# Altium PCB SolarArray1_referencelines.PcbDoc
Units mil, origin at the board's own origin, x right, y up, seen from the top; angles counter-clockwise.
Board outline 3228.35 x 12598.43 mil, 2 copper layers (Top Layer, Bottom Layer), stack 61.7 mil thick; 59 components, 33 nets, 165 pads, 0 vias.
Unrouted connection lines stored in the file: 80.
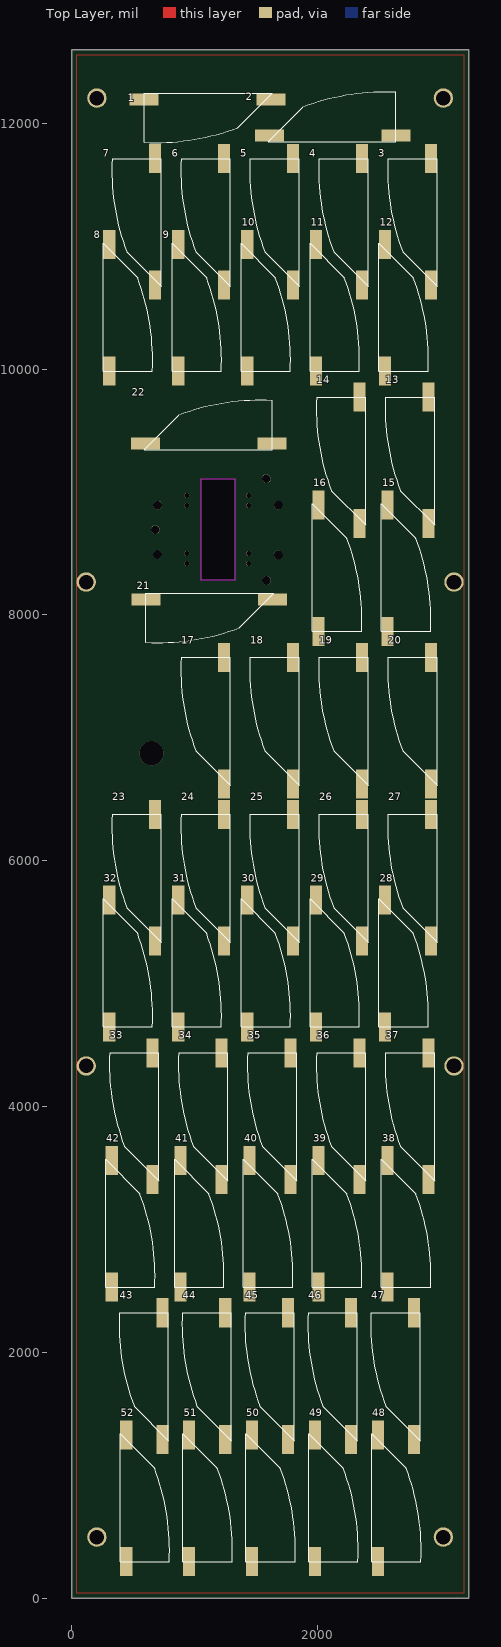
[diagram p0: Top Layer view]
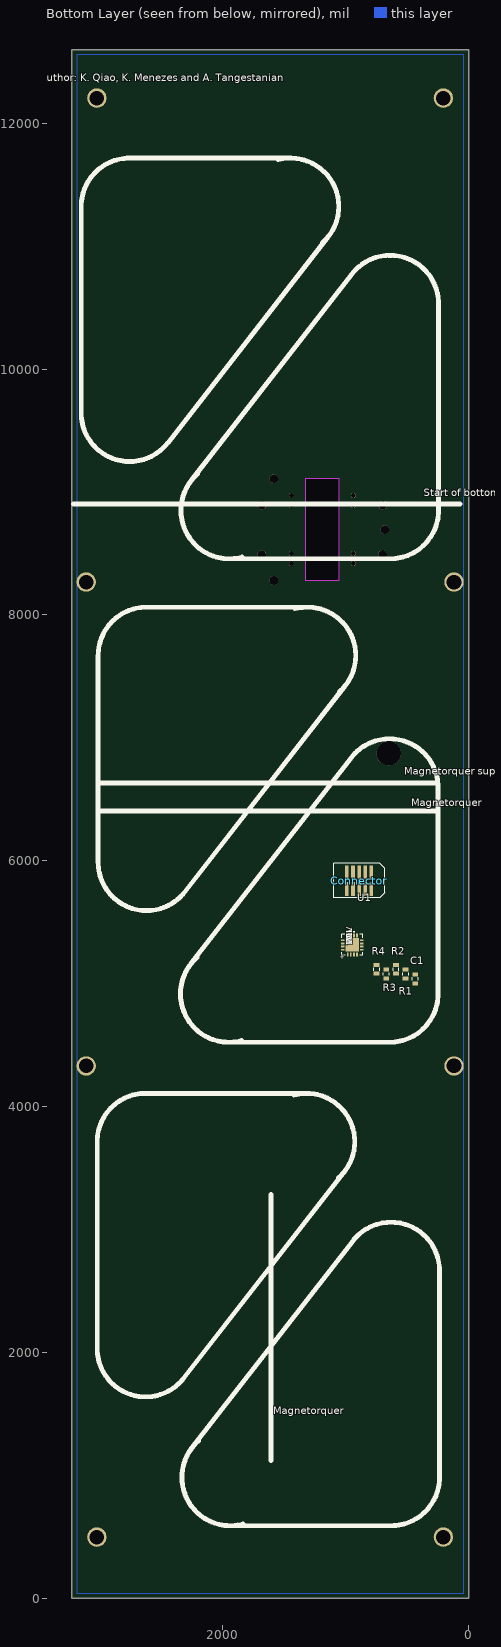
[diagram p1: Bottom Layer view, seen from below]

## Layer stack, top to bottom
Top Solder: solder mask 0.4, Solder Resist, Dk 3.5
Top Layer: signal copper 1.4
Dielectric 1: dielectric 58.9, FR-4, Dk 4.8
Bottom Layer: signal copper 1.4
Bottom Solder: solder mask 0.4, Solder Resist, Dk 3.5

## Board outline
3228.35,0 3228.35,12598.43 0,12598.43 0,0
cut-out: 1327.58,9109.5 1327.58,8282.73 1051.99,8282.73 1051.99,9109.5

## Design rules (kind name [scope] priority, off if disabled: settings)
Clearance Clearance(top_overlay) [OnLayer('Top Overlay') vs OnLayer('Top Overlay')] p1 off: gap=10
Clearance Clearance(bottom) [OnLayer('Bottom Layer') vs OnLayer('Bottom Layer')] p2 off: gap=10
Clearance Clearance(top) [OnLayer('Top Layer') vs OnLayer('Top Layer')] p3 off: gap=10
PolygonConnect [All] p1: connectstyle=Relief reliefconductorwidth=10 reliefentries=4 polygonreliefangle="90 Angle" airgapwidth=10
RoutingVias [All] p1: holewidth=28 width=50 viastyle="Through Hole" minholewidth=28 minwidth=50 maxholewidth=28 maxwidth=50
SolderMaskExpansion [All] p1: expansion=4
Width [All] p1: maxlimit=39.37 minlimit=10 preferedwidth=10 minimp=50.000000 maximp=50.000000 favimp=50.000000
30 further rules are at their usual default settings.

## Components (designator, comment, footprint, x,y, rotation, side; value= is the part's Value field where it differs from the comment)
1 "Trisol X Solar Wing" PCBComponent_1 1740.16,12244.09 r180 top
2 "Trisol X Solar Wing" PCBComponent_1 1488.19,11850.39 r0 top
3 "Trisol X Solar Wing" PCBComponent_1 2972.44,10562.99 r90 top
4 "Trisol X Solar Wing" PCBComponent_1 2411.42,10562.99 r90 top
5 "Trisol X Solar Wing" PCBComponent_1 1850.39,10562.99 r90 top
6 "Trisol X Solar Wing" PCBComponent_1 1289.37,10562.99 r90 top
7 "Trisol X Solar Wing" PCBComponent_1 728.35,10562.99 r90 top
8 "Trisol X Solar Wing" PCBComponent_1 255.91,11133.86 r270 top
9 "Trisol X Solar Wing" PCBComponent_1 816.93,11133.86 r270 top
10 "Trisol X Solar Wing" PCBComponent_1 1377.95,11133.86 r270 top
11 "Trisol X Solar Wing" PCBComponent_1 1938.98,11133.86 r270 top
12 "Trisol X Solar Wing" PCBComponent_1 2500,11133.86 r270 top
13 "Trisol X Solar Wing" PCBComponent_1 2952.76,8622.05 r90 top
14 "Trisol X Solar Wing" PCBComponent_1 2391.73,8622.05 r90 top
15 "Trisol X Solar Wing" PCBComponent_1 2519.68,9015.75 r270 top
16 "Trisol X Solar Wing" PCBComponent_1 1958.66,9015.75 r270 top
17 "Trisol X Solar Wing" PCBComponent_1 1289.37,6503.94 r90 top
18 "Trisol X Solar Wing" PCBComponent_1 1850.39,6503.94 r90 top
19 "Trisol X Solar Wing" PCBComponent_1 2411.42,6503.94 r90 top
20 "Trisol X Solar Wing" PCBComponent_1 2972.44,6503.94 r90 top
21 "Trisol X Solar Wing" PCBComponent_1 1753.86,8175.98 r180 top
22 "Trisol X Solar Wing" PCBComponent_1 479.92,9344.25 r0 top
23 "Trisol X Solar Wing" PCBComponent_1 728.35,5228.35 r90 top
24 "Trisol X Solar Wing" PCBComponent_1 1289.37,5228.35 r90 top
25 "Trisol X Solar Wing" PCBComponent_1 1850.39,5228.35 r90 top
26 "Trisol X Solar Wing" PCBComponent_1 2411.42,5228.35 r90 top
27 "Trisol X Solar Wing" PCBComponent_1 2972.44,5228.35 r90 top
28 "Trisol X Solar Wing" PCBComponent_1 2500,5799.21 r270 top
29 "Trisol X Solar Wing" PCBComponent_1 1938.98,5799.21 r270 top
30 "Trisol X Solar Wing" PCBComponent_1 1377.95,5799.21 r270 top
31 "Trisol X Solar Wing" PCBComponent_1 816.93,5799.21 r270 top
32 "Trisol X Solar Wing" PCBComponent_1 255.91,5799.21 r270 top
33 "Trisol X Solar Wing" PCBComponent_1 708.66,3287.4 r90 top
34 "Trisol X Solar Wing" PCBComponent_1 1269.68,3287.4 r90 top
35 "Trisol X Solar Wing" PCBComponent_1 1830.71,3287.4 r90 top
36 "Trisol X Solar Wing" PCBComponent_1 2391.73,3287.4 r90 top
37 "Trisol X Solar Wing" PCBComponent_1 2952.76,3287.4 r90 top
38 "Trisol X Solar Wing" PCBComponent_1 2519.68,3681.1 r270 top
39 "Trisol X Solar Wing" PCBComponent_1 1958.66,3681.1 r270 top
40 "Trisol X Solar Wing" PCBComponent_1 1397.64,3681.1 r270 top
41 "Trisol X Solar Wing" PCBComponent_1 836.61,3681.1 r270 top
42 "Trisol X Solar Wing" PCBComponent_1 275.59,3681.1 r270 top
43 "Trisol X Solar Wing" PCBComponent_1 787.4,1173.23 r90 top
44 "Trisol X Solar Wing" PCBComponent_1 1299.21,1173.23 r90 top
45 "Trisol X Solar Wing" PCBComponent_1 1811.02,1173.23 r90 top
46 "Trisol X Solar Wing" PCBComponent_1 2322.83,1173.23 r90 top
47 "Trisol X Solar Wing" PCBComponent_1 2834.65,1173.23 r90 top
48 "Trisol X Solar Wing" PCBComponent_1 2440.94,1448.82 r270 top
49 "Trisol X Solar Wing" PCBComponent_1 1929.13,1448.82 r270 top
50 "Trisol X Solar Wing" PCBComponent_1 1417.32,1448.82 r270 top
51 "Trisol X Solar Wing" PCBComponent_1 905.51,1448.82 r270 top
52 "Trisol X Solar Wing" PCBComponent_1 393.7,1448.82 r270 top
C1 "100pF" 0805 433.07,5039.37 r270 bottom
Connector "TFC-105-02-F-D" TFC-105-X2-XX-D 889.76,5838.58 r180 bottom
R1 "1K" 0805 511.81,5078.74 r270 bottom
R2 "1K" 0805 590.55,5118.11 r270 bottom
R3 "1K" 0805 669.29,5078.74 r270 bottom
R4 "1K" 0805 748.03,5118.11 r270 bottom
U1 "ADT7420UCPZ-R2" CP_16_17 944.88,5314.96 r90 bottom

## Footprints (in the part's own frame and the unit in brackets; to place one, negate y for a bottom-side part, rotate by r counter-clockwise, add the part's x,y. Pads: shape width x height; smd on the part's side, far side on the other; paste and mask are expansions set on the pad)
0805 [mil]
  rect 32x48 smd: 1(-35.43,0) 2(36,0)
  silkscreen extent -12,-24 12,24
CP_16_17 [mil]
  rect 30x14 smd: 1(-77.5,38.39) 2(-77.5,12.8) 3(-77.5,-12.8) 4(-77.5,-38.39) 9(77.5,-38.39) 10(77.5,-12.8) 11(77.5,12.8) 12(77.5,38.39)
  rect 14x30 smd: 5(-38.39,-77.5) 6(-12.8,-77.5) 7(12.8,-77.5) 8(38.39,-77.5) 13(38.39,77.5) 14(12.8,77.5) 15(-12.8,77.5) 16(-38.39,77.5)
  rect 110x110 smd paste-54.5: 17(0,0)
  silkscreen extent -86,-86 112,86, body extent 0,0 10,10, height 10
PCBComponent_1 [mm]
  rect 6x2.5 smd: 0(3.048,1.27) 1(29.21,1.27)
  silkscreen extent 2.79,0 29.21,10.22, body extent 2.89,0.06 29.19,10.1, height 0.24
TFC-105-X2-XX-D [mil]
  rect 29x115 smd mask+2: 1(-100,-67.5) 2(-100,67.5) 3(-50,-67.5) 4(-50,67.5) 5(0,-67.5) 6(0,67.5) 7(50,-67.5) 8(50,67.5) 9(100,-67.5) 10(100,67.5)
  silkscreen extent -208,-140 208,140

## Part data
C1: library part CAP0805_1nF
R1 R2 R3 R4: library part RESISTOR0805-RES_1K
U1: "Imported"

## Free pads (board coordinates)
  round 157.48 hole 118.11: 1(118.11,4330.71) 1(118.11,8267.72) 1(204.72,498.03) 1(204.72,12204.73) 1(3023.62,498.03) 1(3023.62,12204.73) 1(3110.24,4330.71) 1(3110.24,8267.72)
  round 196.85 hole 196.85: 1(649.61,6874.02)
  round 70.87 hole 70.87: 1(680.2,8693.42) 1(698.72,8491.76) 1(698.72,8893.33) 1(1583.26,8280.55) 1(1583.26,9108.2) 1(1681.91,8488.18) 1(1681.91,8893.7)
  round 39.37 hole 39.37: 1(937.21,8417.85) 1(937.21,8499.56) 1(937.21,8889.88) 1(937.21,8971.59) 1(1441.15,8417.85) 1(1441.15,8499.56) 1(1441.15,8890.29) 1(1441.15,8972)

## Nets (pads, with @x,y where several pads share a name; then routed paths per layer and width w, separated by ;. In a path a pad name is that pad's centre, name@x,y a point inside that pad or via, vN(x,y) a via of type N, cw(c..) or ccw(c..) an arc to the next point about the centre after c; other vN are vias at no path point)
Net1_0: 1.0 2.1
Net1_1: 1.1 3.1 4.1 5.1 6.1 7.1 13.1 14.1 17.1 19.1 21.1 23.1 24.1 25.1 26.1 27.1 33.1 34.1 35.1 36.1 37.1 43.1 44.1 45.1 46.1 47.1 C1.1 Connector.3 Connector.4 pad.1@118.11,4330.71 pad.1@118.11,8267.72 pad.1@204.72,498.03 pad.1@204.72,12204.73 pad.1@3023.62,498.03 pad.1@3023.62,12204.73 pad.1@3110.24,4330.71 pad.1@3110.24,8267.72 R2.2 R4.2 U1.11
Net2_0: 2.0 8.0 9.0 10.0 11.0 12.0 15.0 16.0 18.0 20.0 22.0 28.0 29.0 30.0 31.0 32.0 38.0 39.0 40.0 41.0 42.0 48.0 49.0 50.0 51.0 52.0 Connector.1 Connector.2
Net3_0: 3.0 12.1
Net4_0: 4.0 11.1
Net5_0: 5.0 10.1
Net6_0: 6.0 9.1
Net7_0: 7.0 8.1
Net13_0: 13.0 15.1
Net14_0: 14.0 16.1
Net17_0: 17.0 18.1
Net19_0: 19.0 20.1
Net21_0: 21.0 22.1
Net23_0: 23.0 32.1
Net24_0: 24.0 31.1
Net25_0: 25.0 30.1
Net26_0: 26.0 29.1
Net27_0: 27.0 28.1
Net33_0: 33.0 42.1
Net34_0: 34.0 41.1
Net35_0: 35.0 40.1
Net36_0: 36.0 39.1
Net37_0: 37.0 38.1
Net43_0: 43.0 52.1
Net44_0: 44.0 51.1
Net45_0: 45.0 50.1
Net46_0: 46.0 49.1
Net47_0: 47.0 48.1
NetC1_2: C1.2 Connector.5 Connector.6 R1.2 R3.2 U1.12
NetConnector_7: Connector.7 Connector.8 U1.2
NetConnector_9: Connector.9 Connector.10 U1.1
NetR1_1: R1.1 R2.1 U1.4
NetR3_1: R3.1 R4.1 U1.3
pads on no net: U1.5 U1.6 U1.7 U1.8 U1.9 U1.10 U1.13 U1.14 U1.15 U1.16 U1.17

## Polygon pours and split planes (outlines as drawn)
Net1_0 on Bottom Layer "Array_neg" (solid, shelved, pour order 4): 3188.98,39.37 39.37,39.37 39.37,12559.06 3188.98,12559.06
Net2_0 on Top Layer "Array_pos" (solid, shelved, pour order 2): 3188.98,39.37 39.37,39.37 39.37,12559.06 3188.98,12559.06

## Silkscreen, mask and mechanical layers (free items; w line width, h text height)
Bottom Overlay:
  lines w10: 1591.39,2070.87 1602.36,2070.87
  lines w39.37: 66.93,8901.57 3212.6,8901.57 ; 259.84,6405.51 2988.19,6405.51 ; 275.59,6633.86 3007.87,6633.86 ; 1000.65,7427.74 2308.5,5746.22 ccw(c2619.26,5987.93) 3012.96,5987.93 3012.96,7669.44 ccw(c2619.26,7669.44) 2619.26,8063.14 1311.42,8063.14 ; 1008.59,3472.49 2316.44,1790.98 ccw(c2627.21,2032.69) 3020.91,2032.69 3020.91,3714.2 ccw(c2627.21,3714.2) 2627.21,4107.9 1319.36,4107.9 ; 1051.18,7374.02 cw(c1311.42,7669.44) 1413.31,8049.73 ; 1059.13,3418.77 cw(c1319.36,3714.2) 1421.26,4094.49 ; 1138.44,11081.28 2446.29,9399.76 ccw(c2757.06,9641.47) 3150.76,9641.47 3150.76,11322.99 ccw(c2757.06,11322.99) 2757.06,11716.69 1449.21,11716.69 ; 1188.98,11027.56 cw(c1449.21,11322.99) 1551.11,11703.27 ; 1606.3,1122.05 1606.3,3287.4 ; 1835.87,603.97 ccw(c1937.77,984.25) 2198,1279.68 ; 1843.74,8470.11 ccw(c1945.64,8850.39) 2205.88,9145.82 ; 1847.68,4537.04 ccw(c1949.58,4917.32) 2209.81,5212.75 ; 1937.77,590.55 629.92,590.55 cw(c629.92,984.25) 236.22,984.25 236.22,2665.77 cw(c629.92,2665.77) 940.69,2907.48 2248.54,1225.96 ; 1945.64,8456.69 637.8,8456.69 cw(c637.8,8850.39) 244.09,8850.39 244.09,10531.91 cw(c637.8,10531.91) 948.56,10773.62 2256.41,9092.1 ; 1949.58,4523.62 641.73,4523.62 cw(c641.73,4917.32) 248.03,4917.32 248.03,6598.84 cw(c641.73,6598.84) 952.5,6840.55 2260.35,5159.03
  text "Author: K. Qiao, K. Menezes and A. Tangestanian" at 3492.13,12342.52 h60
  text "Start of bottom board network" at 362.2,8964.57 h60
  text "Magnetorquer support board" at 523.62,6700.79 h60
  text "Magnetorquer" at 464.57,6444.88 h60
  text "Magnetorquer" at 1586.61,1496.06 h60

## Text inside footprints (layer, text, board x,y; h text height)
Connector: Mechanical 1 "J1" at 907.33,5650.59 h30
U1: Bottom Overlay "*" at 996.06,5197.46 h50 r270; Bottom Overlay "PN" at 944.88,5314.96 h50 r270; Bottom Overlay "DEV" at 944.88,5314.96 h50 r270; Bottom Overlay "VAL" at 944.88,5314.96 h50 r270; Bottom Overlay "TOL" at 944.88,5314.96 h50 r270; Mechanical 13 "*" at 996.06,5252.46 h50 r270; Mechanical 13 "RefDes2" at 944.88,5314.96 h50 r270